# Altium PCB Skayboard.PcbDoc (part 2 of 3)
Units mil, origin at the board's own origin, x right, y up, seen from the top; angles counter-clockwise.
Board outline 13972.57 x 4222.54 mil, 2 copper layers (Top Layer, Bottom Layer); 328 components, 109 nets, 864 pads, 207 vias.
Unrouted connection lines stored in the file: 225.
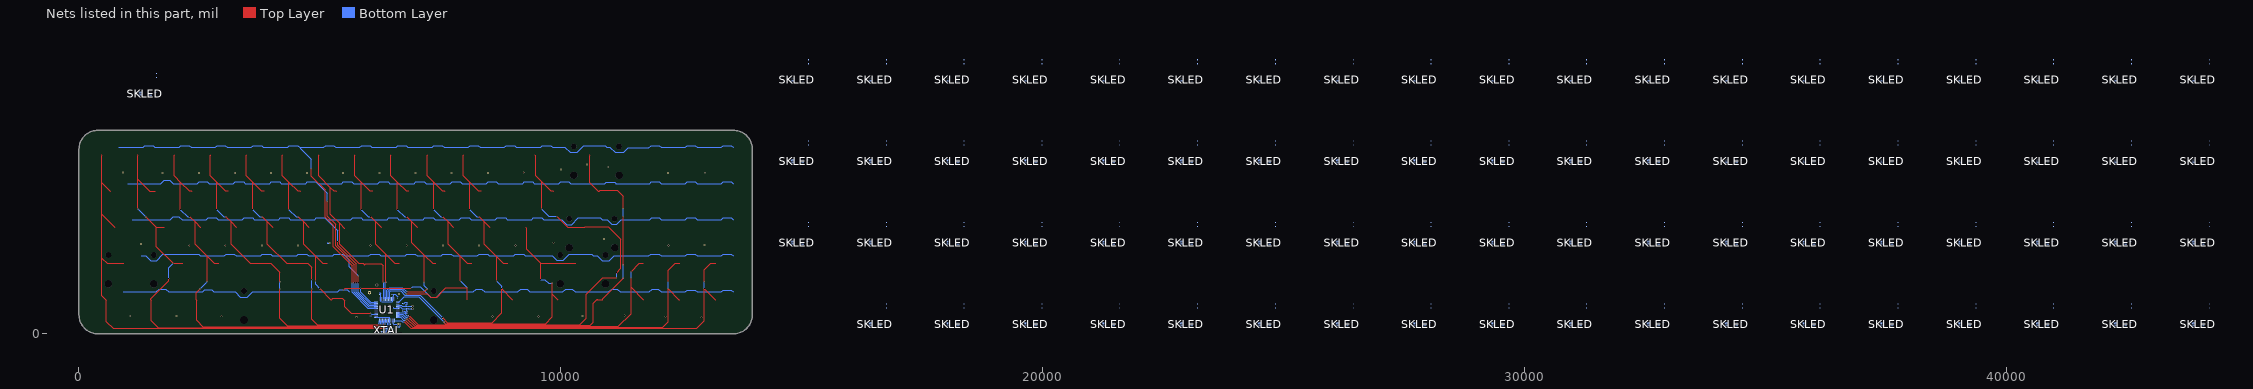
[diagram p2: the nets of this part, all layers, seen from the top]

## Part data
C1 C1 C1 C1 C1 C1 C1 C1 C1 C1 C1 C1 C1 C1 C1 C1 C1 C1 C1 C1 C1 C1 C1 C1 C1 C1 C1 C1 C1 C1 C1 C1 C1 C1 C1 C1 C1 C1 C1 C1 C1 C1 C1 C1 C1 C1 C1 C1 C1 C1 C1 C1 C1 C1 C1 C1 C1 C1 C1 C1 C1 C1 C1 C1 C1 C1 C1 C1 C1 C1 C1 C1 C1 C1 C1 C1 C2 C7 C8 C9 C10 C11 C12 C13: library part CMP-0001-00074-2, Manufacturer=Kemet, Part Number=C0402C104K4RACTU
C3 C4: library part CMP-2008-04368-1, Manufacturer=Murata, Part Number=GRM1555C1H470JA01D
C5 C6: library part CMP-2008-02613-1, Manufacturer="AVX Interconnect / Elco", Part Number=04025A220JAT2A
D1 D1 D1 D1 D1 D1 D1 D1 D1 D1 D1 D1 D1 D1 D1 D1 D1 D1 D1 D1 D1 D1 D1 D1 D1 D1 D1 D1 D1 D1 D1 D1 D1 D1 D1 D1 D1 D1 D1 D1 D1 D1 D1 D1 D1 D1 D1 D1 D1 D1 D1 D1 D1 D1 D1 D1 D1 D1 D1 D1 D1 D1 D1 D1 D1 D1 D1 D1 D1 D1 D1 D1 D1 D1 D1 D1: library part CMP-1667-00004-1, "Fast Switching Diode, 75 V, 0.3 A, -65 to 150 degC, 2-Pin SOD323, RoHS, Tape and Reel", ComponentLink1Description="Manufacturer URL", ComponentLink1URL=http://www.diodes.com/, ComponentLink2Description=Datasheet, ComponentLink2URL=http://www.diodes.com/datasheets/ds30097.pdf, DatasheetVersion="Rev. 25-2, 03/2016", PackageDescription="2-Pin Small Outline Diode, Body 1.7 x 1.3 mm", PackageReference=SOD323-2
MX MX MX MX MX MX MX MX MX MX MX MX MX MX MX MX MX MX MX MX MX MX MX MX MX MX MX MX MX MX MX MX MX MX MX MX MX MX MX MX MX MX MX MX MX MX MX MX MX MX MX MX MX MX MX MX MX MX MX MX MX MX MX MX MX MX MX MX MX MX MX MX MX MX MX MX: library part MX, "Cherry MX Footprint"
R1 R2: library part CMP-2002-08382-1, "22", Manufacturer="Vishay Dale", Part Number=CRCW040222R0FKED
R3: library part CMP-2002-01183-1, Manufacturer=Panasonic, Part Number=ERT-J0ER103J
RST1 USB1: "Header, 2-Pin", LatestRevisionDate=17-Jul-2002, LatestRevisionNote="Re-released for DXP Platform.", Publisher="Altium Limited"
SKLED SKLED SKLED SKLED SKLED SKLED SKLED SKLED SKLED SKLED SKLED SKLED SKLED SKLED SKLED SKLED SKLED SKLED SKLED SKLED SKLED SKLED SKLED SKLED SKLED SKLED SKLED SKLED SKLED SKLED SKLED SKLED SKLED SKLED SKLED SKLED SKLED SKLED SKLED SKLED SKLED SKLED SKLED SKLED SKLED SKLED SKLED SKLED SKLED SKLED SKLED SKLED SKLED SKLED SKLED SKLED SKLED SKLED SKLED SKLED SKLED SKLED SKLED SKLED SKLED SKLED SKLED SKLED SKLED SKLED SKLED SKLED SKLED SKLED SKLED SKLED: library part SK6812, "Individually Adressable SK6812 Mini-E 3528 LED"
U1: library part CMP-0095-00285-2, ComponentLink1Description="Manufacturer URL", ComponentLink1URL=http://www.atmel.com/, ComponentLink2Description="ATmega16U4/32U4 Datasheet", ComponentLink2URL=http://www.atmel.com/dyn/resources/prod_documents/doc7766.pdf, ComponentLink3Description="ATmega16U4 ATmega32U4 Summary", ComponentLink3URL=http://www.atmel.com/dyn/resources/prod_documents/7766S.pdf, DatasheetVersion="revF, Nov-2010", PackageDescription="44-Pin Plastic Thin Quad Flat Pack, 10 x 10 x 1.0 mm Body, 0.8 mm Pitch (TQFP)", PackageReference=44ML, PackageVersion="rev.G, Jul-2007", RevisionNote="DatasheetVersion updated. URLs added."
XTAL: "16Mhz crystal resonator, JLCPCB #C13738"

## Free pads (board coordinates)
  round 70 hole 35: ""(6027.56,854.33) ""(6181.1,1011.81)

## Via types
v1: diameter 40, hole 22, Top Layer to Bottom Layer, 116 vias
v2: diameter 24, hole 12, Top Layer to Bottom Layer, 90 vias
v3: diameter 30, hole 15, Top Layer to Bottom Layer, 1 vias

## Nets (pads, with @x,y where several pads share a name; then routed paths per layer and width w, separated by ;. In a path a pad name is that pad's centre, name@x,y a point inside that pad or via, vN(x,y) a via of type N, cw(c..) or ccw(c..) an arc to the next point about the centre after c; other vN are vias at no path point)
GND: C1.2 C2.2 C3.2 C4.1 C5.1 C6.1 C7.1 C8.1 C9.1 C10.1 C11.1 C12.1 C13.1 pad.@6027.56,854.33 RST1.2 SKLED.3 U1.5 U1.15 U1.23 U1.35 U1.43 XTAL.2 XTAL.4 | length 1593.2
  Bottom Layer w5: 5147.74,1884.89 5148.59,1884.04 v1(5198.98,1884.04) ; U1.15@6452.76,275.59 6452.76,244.03 6437.68,228.95 6437.68,179.74 6449.54,167.88 6465.57,167.88 6465.89,167.57 ; 6740.16,468.5 6756.34,468.5 6784.41,440.44 6793.42,440.44 C4.1@6803.15,430.71
  Bottom Layer w7.5: C13.1@6644.01,137.54 6650.5,144.03 6654,144.03 6665.35,155.39 RST1.2@6665.35,200.79
  Bottom Layer w15: U1.23@6165.35,342.52 6437.01,342.52 6452.76,326.77 U1.15@6452.76,275.59 ; 6232.28,850.39 6232.62,850.05 6254.24,850.05 6263.87,840.42 6263.87,724.5 U1.35@6263.78,724.41 6265.43,722.76 6265.43,688.12 6265.96,687.58 6265.96,675.89 6280.44,661.42 6500,661.42 6514.1,675.52 6514.1,722.76 U1.43@6515.75,724.41 6517.4,726.06 6517.4,778.06 6527.17,787.82 6527.17,818.9 6562.99,818.9 6614.17,767.72 ; v3(6507.87,551.18) 6511.81,551.18 6531.5,531.5 U1.5@6614.17,531.5 ; 6740.16,625.98 6770.53,656.36 C3.2@6802.82,656.36
  Bottom Layer w25: C3.2@6802.82,656.36 C3.2@6803.15,656.69
  other v1: 12917.78,343.05 5754.53,344.55 12168.66,353.98 9532.42,357.71 8583.04,362.71 2959.99,364.55 2020.31,365.68 1063.25,366.55 10450.25,366.56 11324.2,381.18 6643.73,830.02 3795.23,1828.61 4546.35,1830.41 6048.85,1832.48 6801.15,1832.12 7549.15,1832.84 9053.39,1833.56 8300.38,1834.99 2288.77,1836.42 3034.48,1836.42 12229.87,1836.04 12975.91,1841.63 1287.62,1860.26 9844.03,1889.8 10889.43,1965.64 12224.93,3333.33 2488.35,3336.26 1731.83,3337.24 3233.15,3337.23 3981.85,3336.75 6232.37,3336.75 8483.85,3338.21 4730.56,3339.19 5480.73,3338.7 6981.56,3339.68 7730.26,3339.68 12985.84,3341.14 9227.67,3342.61 915.68,3349.44 9997.87,3411.47 10981.97,3458.84 10542.42,3515.99
NetC2_1: C2.1 U1.42
NetC3_1: C3.1 R1.1 U1.3 | length 240.5
  Bottom Layer w5: U1.3@6614.17,594.49 6685.04,594.49 6712.6,566.93 R1.1@6795.28,566.93 C3.1@6795.28,614.17
  Bottom Layer w10: C3.1@6807.09,618.11 C3.1@6807.09,618.9
NetC4_2: C4.2 R2.1 U1.4 | length 255.8
  Bottom Layer w5: U1.4@6614.17,562.99 6670.96,562.99 6710.33,523.62 R2.1@6795.28,523.62 ; C4.2@6795.99,475.66 R2.1@6795.99,522.9
  Bottom Layer w10: R2.1@6795.28,523.62 R2.1@6795.99,522.9 ; C4.2@6795.99,475.66 C4.2@6803.15,468.5
NetC5_2: C5.2 U1.17 XTAL.1 | length 315.4
  Bottom Layer w5: 6364.17,43.31 6405.55,84.68 6405.55,228.45 6404.63,229.32 cw(c6421.26,247.05) 6402.98,231.03 6402.86,231.14 6390.06,243.94 U1.17@6390.06,276.85
  Bottom Layer w20: 6304.72,43.31 6304.93,43.51 6360.44,43.51 6362.2,45.28
NetC6_2: C6.2 U1.16 XTAL.3
NetC13_2: C13.2 R3.2 RST1.1 U1.13 | length 234
  Bottom Layer w7.5: U1.13@6515.75,275.59 6515.75,210.63 R3.2@6527.56,198.82 ; R3.2@6528.54,199.8 6614.37,199.8 RST1.1@6615.35,200.79 6614.76,200.19 6614.76,138.21 C13.2@6614.09,137.54
  Bottom Layer w15: R3.2@6527.56,198.82 R3.2@6528.54,199.8
NetD1_SKEY1_1: D1.1@1609.65,5314.12 D1.1@16750.5,533.89 D1.1@18365.2,533.89 D1.1@19979.89,533.89 D1.1@21594.58,533.89 MX.1@1480.39,5347.13 MX.1@16621.24,566.91 MX.1@18235.94,566.91 MX.1@19850.63,566.91 MX.1@21465.32,566.91 U1.12 | length 8234.3
  Top Layer w5: v2(6744.09,251.97) 6881.89,114.17 12814.96,114.17 12974.41,273.62 v2@12974.41,935.04 ; v2(12974.41,937.01) v2@12974.41,935.04 ; v2(12976.38,1078.74) 12976.38,1326.77 13110.9,1461.29 13211.33,1461.29 ; 13211.33,711.29 13198.16,711.29 v2@12974.41,935.04
  Bottom Layer w5: U1.12@6547.24,275.59 6551.18,271.65 6688.98,271.65 6708.66,251.97 v2(6744.09,251.97) ; v2(12974.41,937.01) 12976.38,938.98 v2(12976.38,1078.74)
NetD1_SKEY1_2: D1.2@1609.65,5397.19 D1.2@18365.2,2306.91 D1.2@21594.58,5686.81 D1.2@23209.28,616.96 D1.2@26438.66,2306.91 D1.2@29668.05,5686.81 D1.2@31282.74,616.96 D1.2@31282.74,3996.86 D1.2@34512.13,2306.91 D1.2@37741.52,5686.81 D1.2@39356.21,616.96 MX.2@1230.39,5247.13 MX.2@17985.94,2156.86 MX.2@21215.32,5536.76 MX.2@22830.02,466.91 MX.2@26059.41,2156.86 MX.2@29288.79,5536.76 MX.2@30903.49,466.91 MX.2@30903.49,3846.81 MX.2@34132.87,2156.86 MX.2@37362.26,5536.76 MX.2@38976.95,466.91 U1.33 | length 13938.8
  Top Layer w5: v2(5488.07,909.45) 5523.5,944.88 v2(5846.46,944.88) v2(6893.7,944.88)
  Bottom Layer w5: 921.11,868.51 1600.79,868.51 1661.42,929.13 1797,929.13 1857.63,868.51 1858.61,868.51 2569.3,868.51 2610.24,909.45 2753.21,909.45 2794.15,868.51 2795.13,868.51 ; 2796.11,868.51 3237.79,868.51 3350.39,755.91 3492.13,755.91 3606.3,870.08 5370.08,870.08 5409.45,909.45 v2(5488.07,909.45) 5566.68,909.45 5607.61,868.52 5608.6,868.52 ; v2(5846.46,944.88) 5846.46,863.12 6052.09,657.48 U1.33@6165.35,657.48 ; v2(6893.7,944.88) 6921.26,972.44 7082.68,972.44 7295.28,759.84 7421.26,759.84 7531.5,870.08 8181.1,870.08 8240.16,929.13 8359.52,929.13 8420.13,868.52 8421.12,868.52 9100.8,868.52 9161.43,929.15 9297.01,929.15 9357.64,868.52 10041.75,868.52 10102.38,929.15 10233.53,929.15 10294.16,868.52 10295.14,868.52 ; 10296.12,868.52 10990.56,868.52 11051.19,929.15 11172.01,929.15 11232.64,868.52 11829.15,868.52 11889.76,929.13 12016.8,929.13 12077.4,868.54 ; 12080.29,868.54 12579.23,868.54 12616.18,905.49 12789.46,905.49 12826.44,868.51 13328.27,868.51 13365.23,905.47 13538.51,905.47 13575.49,868.49
NetD1_SKEY2_2: D1.2@15135.81,5686.81 D1.2@16750.5,616.96 D1.2@18365.2,3996.86 D1.2@19979.89,2306.91 D1.2@23209.28,5686.81 D1.2@24823.97,616.96 D1.2@24823.97,3996.86 D1.2@28053.36,2306.91 D1.2@31282.74,5686.81 D1.2@32897.44,616.96 D1.2@32897.44,3996.86 D1.2@36126.83,2306.91 D1.2@39356.21,3996.86 D1.2@39356.21,5686.81 D1.2@42585.6,2306.91 MX.2@14756.55,5536.76 MX.2@16371.24,466.91 MX.2@17985.94,3846.81 MX.2@19600.63,2156.86 MX.2@22830.02,5536.76 MX.2@24444.71,466.91 MX.2@24444.71,3846.81 MX.2@27674.1,2156.86 MX.2@30903.49,5536.76 MX.2@32518.18,466.91 MX.2@32518.18,3846.81 MX.2@35747.57,2156.86 MX.2@38976.95,3846.81 MX.2@38976.95,5536.76 MX.2@42206.34,2156.86 U1.32 | length 14269.3
  Top Layer w5: v2@5794,1061.72 5799.21,1066.93 v2(5799.21,1200.79)
  Bottom Layer w5: 1296.11,1618.5 1389.37,1618.5 1488.19,1519.68 1610.24,1519.68 1740.16,1649.61 2482.78,1649.61 2513.87,1618.51 2514.86,1618.51 3016.69,1618.51 3053.64,1655.46 3226.92,1655.46 3263.9,1618.48 3766.72,1618.48 3803.67,1655.44 3976.95,1655.44 4013.93,1618.46 4515.76,1618.46 4552.72,1655.41 4726,1655.41 4762.98,1618.43 5264.81,1618.43 5301.76,1655.39 5475.04,1655.39 5512.02,1618.41 ; 5514.86,1618.52 5519.28,1618.52 ; v2(5799.21,1059.06) 5799.21,867.05 6040.28,625.98 U1.32@6165.35,625.98 ; v2@5801.51,1198.49 5798.78,1198.49 5795.58,1201.69 5795.58,1204.42 5610.24,1389.76 5610.24,1527.56 5519.31,1618.48 6016.72,1618.48 6053.67,1655.44 6226.95,1655.44 6263.93,1618.46 ; 6264.82,1618.48 6766.65,1618.48 6803.61,1655.44 6976.88,1655.44 7013.87,1618.46 7515.69,1618.46 7552.65,1655.41 7725.93,1655.41 7762.91,1618.43 ; 7764.9,1618.48 8266.73,1618.48 8303.68,1655.44 8476.96,1655.44 8513.94,1618.46 ; 8514.9,1618.48 9016.73,1618.48 9053.68,1655.44 9226.96,1655.44 9263.94,1618.46 ; 9264.86,1618.52 9818.49,1618.52 9913.39,1523.62 10047.24,1523.62 10169.29,1645.67 10642.98,1645.67 10670.13,1618.52 10671.12,1618.52 10751.56,1618.52 10854.33,1515.75 11003.94,1515.75 11106.3,1618.11 11822.83,1618.11 11858.27,1653.54 12041.41,1653.54 12076.41,1618.54 12077.4,1618.54 12579.23,1618.54 12616.18,1655.49 12789.46,1655.49 12826.44,1618.51 13328.27,1618.51 13365.23,1655.47 13538.51,1655.47 13575.49,1618.49
NetD1_SKEY3_2: D1.2@16750.5,5686.81 D1.2@18365.2,616.96 D1.2@19979.89,3996.86 D1.2@21594.58,2306.91 D1.2@24823.97,5686.81 D1.2@26438.66,616.96 D1.2@26438.66,3996.86 D1.2@29668.05,2306.91 D1.2@32897.44,5686.81 D1.2@34512.13,616.96 D1.2@34512.13,3996.86 D1.2@37741.52,2306.91 D1.2@40970.91,3996.86 D1.2@40970.91,5686.81 D1.2@44200.29,616.96 D1.2@44200.29,2306.91 MX.2@16371.24,5536.76 MX.2@17985.94,466.91 MX.2@19600.63,3846.81 MX.2@21215.32,2156.86 MX.2@24444.71,5536.76 MX.2@26059.41,466.91 MX.2@26059.41,3846.81 MX.2@29288.79,2156.86 MX.2@32518.18,5536.76 MX.2@34132.87,466.91 MX.2@34132.87,3846.81 MX.2@37362.26,2156.86 MX.2@40591.65,3846.81 MX.2@40591.65,5536.76 MX.2@43821.03,466.91 MX.2@43821.03,2156.86 U1.31 | length 15388.5
  Top Layer w5: v2(5370.08,1913.39) 5370.08,1842.52 5755.91,1456.69 v2(5755.91,1059.06)
  Bottom Layer w5: 1108.61,2368.5 1896.06,2368.5 1960.63,2433.07 2074.31,2433.07 2138.87,2368.5 2139.86,2368.5 2641.69,2368.5 2678.64,2405.46 2851.92,2405.46 2888.9,2368.48 3391.72,2368.48 3428.67,2405.43 3601.95,2405.43 3638.93,2368.45 4140.76,2368.45 4177.72,2405.41 4351,2405.41 4387.98,2368.43 4889.81,2368.43 4926.76,2405.38 5100.04,2405.38 5137.02,2368.4 ; 5139.86,2368.51 5140.84,2368.51 ; v2(5370.08,1913.39) 5370.08,2138.29 5156.06,2352.31 5156.06,2353.3 5140.88,2368.48 ; v2(5755.91,1059.06) 5755.91,863.12 6024.53,594.49 U1.31@6165.35,594.49 ; 5888.93,2368.45 5851.95,2405.43 5678.67,2405.43 5641.72,2368.48 5140.88,2368.48 ; 5889.82,2368.48 6391.65,2368.48 6428.61,2405.43 6601.88,2405.43 6638.87,2368.45 7140.69,2368.45 7177.65,2405.41 7350.93,2405.41 7387.91,2368.43 ; 7389.9,2368.48 7891.73,2368.48 7928.68,2405.43 8101.96,2405.43 8138.94,2368.45 ; 8139.9,2368.48 8641.73,2368.48 8678.68,2405.43 8851.96,2405.43 8888.94,2368.45 ; 8889.9,2368.48 9391.73,2368.48 9428.68,2405.43 9601.96,2405.43 9638.94,2368.45 ; 9639.86,2368.51 10017.32,2368.51 10118.11,2267.72 10224.41,2267.72 10362.2,2405.51 10820.61,2405.51 10857.61,2368.51 10858.6,2368.51 10958.26,2368.51 11055.12,2271.65 11157.48,2271.65 11251.97,2366.14 11842.52,2366.14 11885.83,2409.45 12035.5,2409.45 12076.41,2368.53 12077.4,2368.53 12579.23,2368.53 12616.18,2405.49 12789.46,2405.49 12826.44,2368.51 13328.27,2368.51 13365.23,2405.46 13538.51,2405.46 13575.49,2368.48
NetD1_SKEY4_2: D1.2@15135.81,2306.91 D1.2@15135.81,3996.86 D1.2@18365.2,5686.81 D1.2@19979.89,616.96 D1.2@21594.58,3996.86 D1.2@23209.28,2306.91 D1.2@26438.66,5686.81 D1.2@28053.36,616.96 D1.2@28053.36,3996.86 D1.2@31282.74,2306.91 D1.2@34512.13,5686.81 D1.2@36126.83,616.96 D1.2@36126.83,3996.86 D1.2@39356.21,2306.91 D1.2@40970.91,616.96 D1.2@42585.6,3996.86 D1.2@42585.6,5686.81 MX.2@14756.55,2156.86 MX.2@14756.55,3846.81 MX.2@17985.94,5536.76 MX.2@19600.63,466.91 MX.2@21215.32,3846.81 MX.2@22830.02,2156.86 MX.2@26059.41,5536.76 MX.2@27674.1,466.91 MX.2@27674.1,3846.81 MX.2@30903.49,2156.86 MX.2@34132.87,5536.76 MX.2@35747.57,466.91 MX.2@35747.57,3846.81 MX.2@38976.95,2156.86 MX.2@40591.65,466.91 MX.2@42206.34,3846.81 MX.2@42206.34,5536.76 U1.30 | length 16219.8
  Top Layer w5: v2(5153.54,2751.97) 5153.54,2440.94 5322.83,2271.65 5322.83,1826.77 5712.6,1437.01 v2(5712.6,1059.06)
  Bottom Layer w5: 1014.86,3118.5 1701.18,3118.5 1767.72,3185.04 1884.89,3185.04 1951.4,3118.53 1952.39,3118.53 2454.22,3118.53 2491.17,3155.49 2664.45,3155.49 2701.43,3118.51 ; 2702.39,3118.53 3204.22,3118.53 3241.17,3155.49 3414.45,3155.49 3451.43,3118.51 3953.26,3118.51 3990.22,3155.46 4163.49,3155.46 4200.48,3118.48 4702.3,3118.48 4739.26,3155.44 4912.54,3155.44 4949.52,3118.46 4952.4,3118.46 ; 4952.4,3118.53 4953.38,3118.53 4953.46,3118.46 ; v2(5153.54,2751.97) 5153.54,2917.39 4968.6,3102.33 4968.6,3103.31 4953.46,3118.46 ; 5698.56,3118.43 5661.58,3155.41 5488.3,3155.41 5451.35,3118.46 4953.46,3118.46 ; 5702.4,3118.53 6204.23,3118.53 6241.18,3155.49 6414.46,3155.49 6451.44,3118.51 ; v2(5712.6,1059.06) 5712.6,858.27 6007.87,562.99 6041.78,562.99 U1.30@6165.35,562.99 ; 6452.4,3118.53 6954.23,3118.53 6991.18,3155.49 7164.46,3155.49 7201.44,3118.51 7703.27,3118.51 7740.23,3155.46 7913.51,3155.46 7950.49,3118.48 8452.32,3118.48 8489.27,3155.44 8662.55,3155.44 8699.53,3118.46 ; 8702.4,3118.53 9204.23,3118.53 9241.18,3155.49 9414.46,3155.49 9451.44,3118.51 ; 9452.4,3118.53 9954.23,3118.53 9991.18,3155.49 10164.46,3155.49 10201.44,3118.51 ; 10202.4,3118.53 10912.52,3118.53 10939.65,3145.67 11112.93,3145.67 11123.66,3134.95 11123.66,3133.73 11148.7,3108.69 11149.91,3108.69 ; 11139.86,3118.51 11838.98,3118.51 11875.94,3155.47 12039.6,3155.47 12061.2,3133.87 12061.2,3133.75 12076.41,3118.53 12077.4,3118.53 ; 12078.69,3118.53 12579.23,3118.53 12616.18,3155.49 12789.46,3155.49 12826.44,3118.51 13328.27,3118.51 13365.23,3155.46 13538.51,3155.46 13575.49,3118.48
NetD1_SKEY5_2: D1.2@16750.5,2306.91 D1.2@16750.5,3996.86 D1.2@19979.89,5686.81 D1.2@21594.58,616.96 D1.2@23209.28,3996.86 D1.2@24823.97,2306.91 D1.2@28053.36,5686.81 D1.2@29668.05,616.96 D1.2@29668.05,3996.86 D1.2@32897.44,2306.91 D1.2@36126.83,5686.81 D1.2@37741.52,616.96 D1.2@37741.52,3996.86 D1.2@40970.91,2306.91 D1.2@42585.6,616.96 D1.2@44200.29,3996.86 D1.2@44200.29,5686.81 MX.2@16371.24,2156.86 MX.2@16371.24,3846.81 MX.2@19600.63,5536.76 MX.2@21215.32,466.91 MX.2@22830.02,3846.81 MX.2@24444.71,2156.86 MX.2@27674.1,5536.76 MX.2@29288.79,466.91 MX.2@29288.79,3846.81 MX.2@32518.18,2156.86 MX.2@35747.57,5536.76 MX.2@37362.26,466.91 MX.2@37362.26,3846.81 MX.2@40591.65,2156.86 MX.2@42206.34,466.91 MX.2@43821.03,3846.81 MX.2@43821.03,5536.76 U1.29 | length 17490.6
  Top Layer w5: v2(4822.83,3421.26) 4822.83,3271.65 5106.3,2988.19 5106.3,2421.26 5271.65,2255.91 5271.65,1807.09 5665.35,1413.39 v2(5665.35,1059.06)
  Bottom Layer w5: 827.36,3868.56 1329.19,3868.56 1366.14,3905.51 1539.42,3905.51 1576.4,3868.53 1577.39,3868.53 2079.22,3868.53 2116.17,3905.49 2289.45,3905.49 2326.43,3868.51 2828.26,3868.51 2865.22,3905.46 3038.5,3905.46 3075.48,3868.48 3577.3,3868.48 3614.26,3905.44 3787.54,3905.44 3824.52,3868.46 ; 3827.39,3868.53 4329.22,3868.53 4366.17,3905.49 4539.45,3905.49 4576.43,3868.51 ; 4577.32,3868.53 4578.3,3868.53 ; v2(4822.83,3421.26) 4822.83,3623.02 4593.52,3852.33 4593.52,3853.31 4578.3,3868.53 ; v2(5665.35,1059.06) 5665.35,858.27 5992.13,531.5 U1.29@6165.35,531.5 ; 6075.41,3868.48 6038.43,3905.46 5865.15,3905.46 5828.19,3868.51 5326.36,3868.51 5289.38,3905.49 5116.1,3905.49 5079.15,3868.53 4578.3,3868.53 ; 6077.4,3868.53 6579.23,3868.53 6616.18,3905.49 6789.46,3905.49 6826.44,3868.51 ; 6827.4,3868.53 7329.23,3868.53 7366.18,3905.49 7539.46,3905.49 7576.44,3868.51 ; 7577.4,3868.53 8079.23,3868.53 8116.18,3905.49 8289.46,3905.49 8326.44,3868.51 8828.27,3868.51 8865.23,3905.46 9038.51,3905.46 9075.49,3868.48 ; 9077.4,3868.53 9579.23,3868.53 9616.18,3905.49 9789.46,3905.49 9826.44,3868.51 ; 9827.4,3868.53 10084.22,3868.53 10188.98,3763.78 10342.52,3763.78 10476.38,3897.64 10922.31,3897.64 10951.41,3868.53 10952.4,3868.53 11017.3,3868.53 11122.05,3763.78 11299.21,3763.78 11397.64,3862.2 11826.77,3862.2 11870.08,3905.51 12039.43,3905.51 12076.41,3868.53 12077.4,3868.53 12579.23,3868.53 12616.18,3905.49 12789.46,3905.49 12826.44,3868.51 13328.27,3868.51 13365.23,3905.46 13538.51,3905.46 13575.49,3868.48
NetD1_SKEY6_1: D1.1@23209.28,533.89 D1.1@24823.97,533.89 D1.1@26438.66,533.89 D1.1@28053.36,533.89 D1.1@29668.05,533.89 MX.1@23080.02,566.91 MX.1@24694.71,566.91 MX.1@26309.41,566.91 MX.1@27924.1,566.91 MX.1@29538.79,566.91 U1.11 | length 7438
  Top Layer w5: v2(6773.04,282.73) 6921.92,133.86 12110.24,133.86 12224.41,248.03 v2@12224.41,935.04 ; v2(12224.41,937.01) v2@12224.41,935.04 ; v2(12224.41,1082.68) 12224.41,1314.96 12370.74,1461.29 12461.33,1461.29 ; 12461.33,711.29 12448.16,711.29 v2@12224.41,935.04
  Bottom Layer w5: U1.11@6614.17,342.52 6673.23,342.52 6733.01,282.73 v2(6773.04,282.73) ; v2(12224.41,937.01) v2(12224.41,1082.68)
NetD1_SKEY11_1: D1.1@31282.74,533.89 D1.1@32897.44,533.89 D1.1@34512.13,533.89 D1.1@36126.83,533.89 D1.1@37741.52,533.89 MX.1@31153.49,566.91 MX.1@32768.18,566.91 MX.1@34382.87,566.91 MX.1@35997.57,566.91 MX.1@37612.26,566.91 U1.10 | length 6602.4
  Top Layer w5: v2(6802.76,312.25) 6804.15,312.25 6962.86,153.54 11193.21,153.54 11456.69,417.03 11456.69,965.92 ; v2(11456.69,1153.54) 11456.69,965.92 ; v2(11456.69,1291.34) 11626.64,1461.29 11711.33,1461.29 ; 11711.33,711.29 11456.69,965.92
  Bottom Layer w5: U1.10@6614.17,374.02 6696.85,374.02 6758.61,312.25 v2(6802.76,312.25) ; v2(11456.69,1153.54) v2(11456.69,1291.34)
NetD1_SKEY16_1: D1.1@39356.21,533.89 D1.1@40970.91,533.89 D1.1@42585.6,533.89 MX.1@39226.95,566.91 MX.1@40841.65,566.91 MX.1@42456.34,566.91 U1.9 | length 8528.1
  Top Layer w5: v2(6831.48,343.77) 7002.01,173.23 10606.3,173.23 10669.29,236.22 10669.29,629.92 10751.97,712.6 10753.57,712.6 10754.9,711.27 10867.53,711.27 10867.53,729.73 11291.34,1153.54 v2(11291.34,1157.48) ; 10586.33,3711.29 10598.43,3699.19 10598.43,3136.63 10773.79,2961.27 10796.79,2961.27 10815.84,2980.32 11165.35,2980.32 11291.34,2854.33 v2(11291.34,2602.36) ; v2(11291.34,1429.13) v2(11291.34,2429.13)
  Bottom Layer w5: U1.9@6614.17,405.51 6720.47,405.51 6782.22,343.77 v2(6831.48,343.77) ; v2(11291.34,1157.48) v2(11291.34,1429.13) ; v2(11291.34,2429.13) v2(11291.34,2602.36)
NetD1_SKEY19_1: D1.1@15135.81,2223.84 D1.1@16750.5,2223.84 D1.1@44200.29,533.89 MX.1@15006.55,2256.86 MX.1@16621.24,2256.86 MX.1@44071.03,566.91 U1.8 | length 9579.6
  Top Layer w5: v2(6854.21,377.87) 7039.17,192.91 10393.7,192.91 10527.56,326.77 10527.56,818.9 10870.08,1161.42 v2(11153.54,1161.42) ; 9461.33,3711.29 9472.45,3700.16 9472.45,3279.53 9598.43,3153.56 ; v2(9598.43,2586.61) 9598.43,3153.56 ; 9836.33,2961.29 9832.39,2965.23 9786.75,2965.23 9598.43,3153.56 ; v2(9917.32,2437.01) 10143.07,2211.27 10492.53,2211.27 10505.67,2224.41 10980.31,2224.41 11240.16,1964.57 11240.16,1358.27 11153.54,1271.65 v2(11152.56,1271.65)
  Bottom Layer w5: U1.8@6614.17,437.01 6744.09,437.01 6803.23,377.87 v2(6854.21,377.87) ; v2(9598.43,2586.61) 9748.03,2437.01 v2(9917.32,2437.01) ; v2(11152.56,1271.65) 11153.54,1270.67 v2(11153.54,1161.42)
NetD1_SKEY22_1: D1.1@18365.2,2223.84 D1.1@19979.89,2223.84 D1.1@21594.58,2223.84 D1.1@23209.28,2223.84 D1.1@24823.97,2223.84 MX.1@18235.94,2256.86 MX.1@19850.63,2256.86 MX.1@21465.32,2256.86 MX.1@23080.02,2256.86 MX.1@24694.71,2256.86 U1.1 | length 6609.6
  Top Layer w5: v2(7566.93,244.09) 7570.87,244.09 7602.36,212.6 9681.1,212.6 9818.9,350.39 9818.9,822.42 ; 9273.79,2211.27 9287.4,2197.65 9287.4,1751.97 9578.1,1461.27 ; v2(9578.74,1125.98) 9578.74,1460.63 9578.1,1461.27 ; v2(9818.9,1051.18) 9818.9,822.42 ; 9930.05,711.27 9818.9,822.42 ; 10305.05,1461.27 9578.1,1461.27
  Bottom Layer w5: U1.1@6614.17,657.48 6637.68,657.48 6646.28,666.08 6646.28,669.9 6744.09,767.72 7047.24,767.72 7566.93,248.03 v2(7566.93,244.09) ; v2(9578.74,1125.98) 9669.29,1125.98 9744.09,1051.18 v2(9818.9,1051.18)
NetD1_SKEY27_1: D1.1@26438.66,2223.84 D1.1@28053.36,2223.84 D1.1@29668.05,2223.84 D1.1@31282.74,2223.84 D1.1@32897.44,2223.84 MX.1@26309.41,2256.86 MX.1@27924.1,2256.86 MX.1@29538.79,2256.86 MX.1@31153.49,2256.86 MX.1@32768.18,2256.86 U1.41 | length 7528.8
  Top Layer w5: v2(7543.31,334.65) 7645.67,232.28 8570.87,232.28 8771.65,433.07 v2@8771.65,932.14 ; 7961.33,3711.29 7972.45,3700.16 7972.45,3279.53 8106.31,3145.67 ; v2(8106.31,2578.74) 8106.31,3145.67 ; v2@8300.43,2429.13 8409.37,2320.2 ; 8336.33,2961.29 8332.39,2965.23 8286.75,2965.23 8106.31,3145.67 ; 8518.31,2211.26 8409.37,2320.2 ; v2(8665.35,1092.51) 8665.35,1602.04 ; v2(8771.65,937.01) v2@8771.65,932.14 ; 8898.8,1461.26 8806.47,1461.26 8409.37,1858.36 8409.37,2320.2 ; 8992.53,711.27 v2@8771.65,932.14
  Bottom Layer w5: U1.41@6452.76,724.41 6452.76,872.49 6470.03,889.76 6673.23,889.76 6763.78,799.21 7078.74,799.21 v2(7543.31,334.65) ; v2(8106.31,2578.74) 8255.92,2429.13 v2(8295.29,2429.13) ; v2(8665.35,1092.51) 8771.65,986.21 v2(8771.65,937.01)
NetD1_SKEY32_1: D1.1@34512.13,2223.84 D1.1@36126.83,2223.84 D1.1@37741.52,2223.84 D1.1@39356.21,2223.84 D1.1@40970.91,2223.84 MX.1@34382.87,2256.86 MX.1@35997.57,2256.86 MX.1@37612.26,2256.86 MX.1@39226.95,2256.86 MX.1@40841.65,2256.86 U1.40 | length 6095.6
  Top Layer w5: v2(6787.4,830.71) 7224.41,830.71 7295.28,759.84 7421.26,759.84 7614.17,952.76 8057.05,952.76 v2(8059.06,952.76) 8057.05,950.75 8057.05,713.27 8055.05,711.27 ; 7211.33,3711.29 7222.45,3700.16 7222.45,3279.53 7356.31,3145.67 ; v2(7356.31,2578.74) 7356.31,3145.67 ; v2@7550.43,2429.13 7659.37,2320.2 ; 7586.33,2961.29 7582.39,2965.23 7536.75,2965.23 7356.31,3145.67 ; 7768.31,2211.26 7659.37,2320.2 ; v2(7913.39,1098.43) 7913.39,1604.34 7911.43,1606.3 ; 8148.8,1461.26 8056.47,1461.26 7911.43,1606.3 ; 7659.37,2320.2 7659.37,1858.36 7911.43,1606.3
  Bottom Layer w5: U1.40@6421.26,724.41 6421.26,885.83 6460.63,925.2 6692.91,925.2 v2(6787.4,830.71) ; v2(7356.31,2578.74) 7505.92,2429.13 v2(7545.29,2429.13) ; v2(7913.39,1098.43) v2(8059.06,952.76)
NetD1_SKEY37_1: D1.1@15135.81,3913.79 D1.1@16750.5,3913.79 D1.1@42585.6,2223.84 D1.1@44200.29,2223.84 MX.1@15006.55,3946.81 MX.1@16621.24,3946.81 MX.1@42456.34,2256.86 MX.1@44071.03,2256.86 U1.39 | length 4986
  Top Layer w5: 6461.33,3711.29 6472.45,3700.16 6472.45,3279.53 6606.31,3145.67 ; v2(6606.31,2578.74) 6606.31,3145.67 ; v2@6800.43,2429.13 6909.37,2320.2 ; v2(6812.13,871.59) 7162.93,871.59 v2(7224.41,933.07) ; 6836.33,2961.29 6832.39,2965.23 6786.75,2965.23 6606.31,3145.67 ; 7018.31,2211.26 6909.37,2320.2 ; v2(7161.42,1070.87) 7161.42,1635.12 ; 7398.8,1461.26 7335.28,1461.26 7161.42,1635.12 ; 6909.37,2320.2 6909.37,1887.17 7161.42,1635.12
  Bottom Layer w5: U1.39@6389.76,724.41 6389.76,905.51 6444.88,960.63 6708.66,960.63 6797.7,871.59 v2(6812.13,871.59) ; v2(6606.31,2578.74) 6755.92,2429.13 v2(6795.29,2429.13) ; v2(7161.42,1070.87) 7161.42,996.06 v2(7224.41,933.07)
NetD1_SKEY41_1: D1.1@18365.2,3913.79 D1.1@19979.89,3913.79 D1.1@21594.58,3913.79 D1.1@23209.28,3913.79 MX.1@18235.94,3946.81 MX.1@19850.63,3946.81 MX.1@21465.32,3946.81 MX.1@23080.02,3946.81 U1.38 | length 4101.9
  Top Layer w5: 5711.33,3711.29 5722.45,3700.16 5722.45,3279.53 5856.31,3145.67 ; v2(5856.31,2578.74) 5856.31,3145.67 ; v2@6050.43,2429.13 6159.37,2320.2 ; 6086.33,2961.29 6082.39,2965.23 6036.75,2965.23 5856.31,3145.67 ; 6268.31,2211.26 6159.37,2320.2 ; v2(6370.08,1070.87) 6370.08,1647.65 ; 6648.8,1461.26 6556.47,1461.26 6370.08,1647.65 ; 6159.37,2320.2 6159.37,1858.36 6370.08,1647.65
  Bottom Layer w5: v2(5856.31,2578.74) 6005.92,2429.13 v2(6045.29,2429.13) ; U1.38@6358.27,724.41 6358.27,1055.1 6370.08,1066.91 v2(6370.08,1070.87)
NetD1_SKEY45_1: D1.1@24823.97,3913.79 D1.1@26438.66,3913.79 D1.1@28053.36,3913.79 D1.1@29668.05,3913.79 MX.1@24694.71,3946.81 MX.1@26309.41,3946.81 MX.1@27924.1,3946.81 MX.1@29538.79,3946.81 U1.37 | length 4132.6
  Top Layer w5: 4961.29,3711.32 4972.41,3700.2 4972.41,3279.57 5216.54,3035.44 ; 5336.29,2961.32 5332.35,2965.26 5286.72,2965.26 5216.54,3035.44 ; 5515.75,2192.91 5507.87,2192.91 5409.33,2291.46 ; 5898.76,1461.3 5806.43,1461.3 5409.33,1858.4 5409.33,2291.46 ; 5898.79,1461.27 5923.05,1437.01 5930.05,1437.01 5945.32,1452.27 6276.08,1452.27 6314.96,1413.39 v2(6314.96,1070.87) ; 5216.54,3035.44 5216.54,2484.25 5409.33,2291.46
  Bottom Layer w5: v2(6314.96,1070.87) 6314.96,1066.91 6326.77,1055.1 U1.37@6326.77,724.41
NetD1_SKEY49_1: D1.1@31282.74,3913.79 D1.1@32897.44,3913.79 D1.1@34512.13,3913.79 D1.1@36126.83,3913.79 D1.1@37741.52,3913.79 MX.1@31153.49,3946.81 MX.1@32768.18,3946.81 MX.1@34382.87,3946.81 MX.1@35997.57,3946.81 MX.1@37612.26,3946.81 U1.25 | length 5363.7
  Top Layer w5: 4211.25,3711.29 4222.37,3700.16 4222.37,3279.53 4356.23,3145.67 ; v2(4356.23,2578.74) 4356.23,3145.67 ; v2@4550.35,2429.13 4659.29,2320.2 ; 4586.25,2961.29 4582.31,2965.23 4536.68,2965.23 4356.23,3145.67 ; 4768.23,2211.26 4659.29,2320.2 ; v2(4909.45,1094.49) 4909.45,1604.4 4911.35,1606.3 ; v2(4996.06,937.01) 5001.2,937.01 5226.94,711.27 5242.53,711.27 5267.48,736.22 5464.57,736.22 5515.75,685.04 5515.75,559.06 5645.67,429.13 v2(6047.24,429.13) ; 5148.72,1461.26 5056.39,1461.26 4911.35,1606.3 ; 4659.29,2320.2 4659.29,1858.36 4911.35,1606.3
  Bottom Layer w5: v2(4356.23,2578.74) 4505.84,2429.13 v2(4545.21,2429.13) ; v2(4909.45,1094.49) 4909.45,1023.62 v2(4996.06,937.01) ; v2(6047.24,429.13) 6070.87,405.51 U1.25@6165.35,405.51
NetD1_SKEY54_1: D1.1@39356.21,3913.79 D1.1@40970.91,3913.79 D1.1@42585.6,3913.79 D1.1@44200.29,3913.79 MX.1@39226.95,3946.81 MX.1@40841.65,3946.81 MX.1@42456.34,3946.81 MX.1@44071.03,3946.81 U1.22 | length 6240.7
  Top Layer w5: 3461.31,3711.29 3472.44,3700.16 3472.44,3279.53 3606.3,3145.67 ; v2(3606.3,2578.74) 3606.3,3145.67 ; v2@3800.42,2429.13 3909.36,2320.2 ; 3836.31,2961.29 3832.37,2965.23 3786.74,2965.23 3606.3,3145.67 ; 4018.29,2211.26 3909.36,2320.2 ; 4398.79,1461.26 4306.46,1461.26 3909.36,1858.36 3909.36,2320.2 ; 4398.79,1461.27 4747.39,1461.27 4830.71,1377.95 v2(4830.71,1122.05) ; v2(4830.71,929.13) 4830.71,303.15 4944.88,188.98 6212.6,188.98 6219.82,196.2 v2(6222.8,196.2)
  Bottom Layer w5: v2(3606.3,2578.74) 3755.91,2429.13 v2(3795.28,2429.13) ; v2(4830.71,929.13) v2(4830.71,1122.05) ; v2(6222.8,196.2) 6222.8,204.32 6232.28,213.8 U1.22@6232.28,275.59
NetD1_SKEY58_1: D1.1@15135.81,5603.74 D1.1@16750.5,5603.74 D1.1@18365.2,5603.74 D1.1@19979.89,5603.74 MX.1@15006.55,5636.76 MX.1@16621.24,5636.76 MX.1@18235.94,5636.76 MX.1@19850.63,5636.76 U1.21 | length 8474.7
  Top Layer w5: 2711.26,3709.76 2722.39,3698.64 2722.39,3278.01 2856.25,3144.15 ; 2711.31,3711.29 2722.44,3700.16 2722.44,3279.53 2856.3,3145.67 ; v2(2856.25,2577.22) 2856.25,3144.15 ; v2@2856.3,2578.74 2856.3,3144.1 ; v2@3050.42,2429.13 3159.36,2320.2 ; 3086.26,2959.76 3082.32,2963.7 3036.69,2963.7 2856.3,3144.1 ; 3086.31,2961.29 3082.37,2965.23 3036.74,2965.23 2856.3,3145.67 ; 3268.29,2211.26 3159.36,2320.2 ; 3556.41,1459.74 3648.74,1459.74 ; 3556.46,1461.26 3159.36,1858.36 3159.36,2320.2 ; 3648.79,1461.27 3983.62,1461.27 4145.67,1299.21 4169.29,1275.59 v2(4169.29,1078.74) ; v2(4169.29,929.13) 4169.29,326.02 4326.02,169.29 6244.73,169.29 v2(6263.53,188.09) ; 2856.25,3144.15 2856.3,3144.1 ; 2856.3,3144.1 2856.3,3145.67
  Bottom Layer w5: v2(2856.25,2577.22) 3005.86,2427.61 v2(3045.23,2427.61) ; v2(4169.29,929.13) v2(4169.29,1078.74) ; v2(6263.53,188.09) 6263.53,274.47 6264.22,275.15 U1.21@6263.78,275.59
NetD1_SKEY62_1: D1.1@21594.58,5603.74 D1.1@23209.28,5603.74 D1.1@24823.97,5603.74 D1.1@26438.66,5603.74 D1.1@28053.36,5603.74 MX.1@21465.32,5636.76 MX.1@23080.02,5636.76 MX.1@24694.71,5636.76 MX.1@26309.41,5636.76 MX.1@27924.1,5636.76 U1.20 | length 8641.3
  Top Layer w5: 1961.31,3711.29 1972.44,3700.16 1972.44,3279.53 2106.3,3145.67 ; v2(2106.3,2578.74) 2106.3,3145.67 ; v2(2295.28,2429.13) 2300.42,2429.13 2409.36,2320.2 ; 2336.31,2961.29 2332.37,2965.23 2286.74,2965.23 2106.3,3145.67 ; v2(2515.75,933.07) 2430.04,847.36 2430.04,711.26 2440.94,700.36 2440.94,279.53 2570.87,149.61 6280.31,149.61 6290.21,159.51 v2(6294.7,159.51) ; 2523.79,2211.26 2518.29,2211.26 2409.36,2320.2 ; v2(2661.42,1078.74) 2661.42,1606.3 ; 2898.79,1461.26 2806.46,1461.26 2661.42,1606.3 ; 2409.36,2320.2 2409.36,1858.36 2661.42,1606.3
  Bottom Layer w5: v2(2106.3,2578.74) 2255.91,2429.13 v2(2295.28,2429.13) ; v2(2515.75,933.07) v2(2661.42,1078.74) ; v2(6294.7,159.51) 6294.7,270.71 6295.39,271.4 6294.72,272.07 6294.83,272.18 6293.35,273.66 U1.20@6295.28,275.59
NetD1_SKEY67_1: D1.1@29668.05,5603.74 D1.1@31282.74,5603.74 D1.1@32897.44,5603.74 D1.1@34512.13,5603.74 D1.1@36126.83,5603.74 MX.1@29538.79,5636.76 MX.1@31153.49,5636.76 MX.1@32768.18,5636.76 MX.1@34382.87,5636.76 MX.1@35997.57,5636.76 U1.19 | length 9783.2
  Top Layer w5: 1211.31,3711.29 1224.41,3698.19 1224.41,3208.66 ; v2(1224.41,2594.49) 1224.41,3208.66 ; v2(1389.76,2429.13) 1607.64,2211.26 ; 1586.31,2961.29 1471.79,2961.29 1224.41,3208.66 ; 1773.79,2211.26 1607.64,2211.26 ; v2(1862.2,1149.61) 1862.2,1098.43 1492.54,728.76 1492.54,711.26 1503.94,699.86 1503.94,275.59 1649.61,129.92 6303.14,129.92 6326.76,153.54 v2(6326.76,200.79) ; 2148.79,1461.26 2148.15,1460.63 v2(1952.76,1460.63) 1607.64,1805.75 1607.64,2211.26
  Bottom Layer w5: v2(1224.41,2594.49) v2(1389.76,2429.13) ; v2(1862.2,1149.61) 1862.2,1370.08 v2(1952.76,1460.63) ; v2(6326.76,200.79) 6326.76,267.7 6330.71,271.65 U1.19@6326.77,275.59
NetD1_SKEY72_1: D1.1@37741.52,5603.74 D1.1@39356.21,5603.74 D1.1@40970.91,5603.74 D1.1@42585.6,5603.74 D1.1@44200.29,5603.74 MX.1@37612.26,5636.76 MX.1@39226.95,5636.76 MX.1@40841.65,5636.76 MX.1@42456.34,5636.76 MX.1@44071.03,5636.76 U1.18 | length 10609
  Top Layer w5: 461.29,3711.31 476.38,3696.22 476.38,3133.66 ; 648.78,2961.26 476.38,3133.66 ; 742.53,2211.25 476.38,2477.41 ; 929.61,1460.84 582.47,1460.84 476.38,1566.93 ; v2@6358.27,165.35 6358.27,141.73 6326.77,110.24 712.6,110.24 570.87,251.97 570.87,695.43 555.03,711.26 476.38,789.92 476.38,1566.93 ; 476.38,1566.93 476.38,2477.41 ; 476.38,2477.41 476.38,3133.66
  Bottom Layer w5: v2(6358.05,172.44) 6358.05,273.4 U1.18@6358.27,273.62 ; U1.18@6358.27,275.59 U1.18@6360.24,273.62
NetR1_2: R1.2 USB1.2 | length 99.6
  Bottom Layer w5: R1.2@6828.15,568.31 USB1.2@6923.82,568.31
  Bottom Layer w10: R1.2@6826.77,566.93 R1.2@6828.15,568.31 ; USB1.2@6923.82,568.31 USB1.2@6925.2,569.68
NetR2_2: R2.2 USB1.1 | length 100.1
  Bottom Layer w5: R2.2@6826.77,523.62 USB1.1@6921.26,523.62
  Bottom Layer w10: USB1.1@6921.26,523.62 USB1.1@6925.2,519.68
NetSKLED_SKEY1_2: SKLED.2@1479.29,4952.74
NetSKLED_SKEY2_2: SKLED.2@16620.14,172.52 SKLED.4@1274.57,5007.86
NetSKLED_SKEY3_2: SKLED.2@18234.84,172.52 SKLED.4@16415.42,227.64
NetSKLED_SKEY4_2: SKLED.2@19849.53,172.52 SKLED.4@18030.11,227.64
NetSKLED_SKEY5_2: SKLED.2@21464.22,172.52 SKLED.4@19644.8,227.64
NetSKLED_SKEY6_2: SKLED.2@23078.92,172.52 SKLED.4@21259.5,227.64
NetSKLED_SKEY7_2: SKLED.2@24693.61,172.52 SKLED.4@22874.19,227.64
NetSKLED_SKEY8_2: SKLED.2@26308.3,172.52 SKLED.4@24488.89,227.64
NetSKLED_SKEY9_2: SKLED.2@27923,172.52 SKLED.4@26103.58,227.64
NetSKLED_SKEY10_2: SKLED.2@29537.69,172.52 SKLED.4@27718.27,227.64
NetSKLED_SKEY11_2: SKLED.2@31152.38,172.52 SKLED.4@29332.97,227.64
NetSKLED_SKEY12_2: SKLED.2@32767.08,172.52 SKLED.4@30947.66,227.64
NetSKLED_SKEY13_2: SKLED.2@34381.77,172.52 SKLED.4@32562.35,227.64
NetSKLED_SKEY14_2: SKLED.2@35996.46,172.52 SKLED.4@34177.05,227.64
NetSKLED_SKEY15_2: SKLED.2@37611.16,172.52 SKLED.4@35791.74,227.64
NetSKLED_SKEY16_2: SKLED.2@39225.85,172.52 SKLED.4@37406.43,227.64
NetSKLED_SKEY17_2: SKLED.2@40840.55,172.52 SKLED.4@39021.13,227.64
NetSKLED_SKEY18_2: SKLED.2@42455.24,172.52 SKLED.4@40635.82,227.64
NetSKLED_SKEY19_2: SKLED.2@44069.93,172.52 SKLED.4@42250.51,227.64
NetSKLED_SKEY20_2: SKLED.2@15005.45,1862.47 SKLED.4@43865.21,227.64
NetSKLED_SKEY21_2: SKLED.2@16620.14,1862.47 SKLED.4@14800.72,1917.59
NetSKLED_SKEY22_2: SKLED.2@18234.84,1862.47 SKLED.4@16415.42,1917.59
NetSKLED_SKEY23_2: SKLED.2@19849.53,1862.47 SKLED.4@18030.11,1917.59
NetSKLED_SKEY24_2: SKLED.2@21464.22,1862.47 SKLED.4@19644.8,1917.59
NetSKLED_SKEY25_2: SKLED.2@23078.92,1862.47 SKLED.4@21259.5,1917.59
NetSKLED_SKEY26_2: SKLED.2@24693.61,1862.47 SKLED.4@22874.19,1917.59
NetSKLED_SKEY27_2: SKLED.2@26308.3,1862.47 SKLED.4@24488.89,1917.59
NetSKLED_SKEY28_2: SKLED.2@27923,1862.47 SKLED.4@26103.58,1917.59
NetSKLED_SKEY29_2: SKLED.2@29537.69,1862.47 SKLED.4@27718.27,1917.59
NetSKLED_SKEY30_2: SKLED.2@31152.38,1862.47 SKLED.4@29332.97,1917.59
NetSKLED_SKEY31_2: SKLED.2@32767.08,1862.47 SKLED.4@30947.66,1917.59
NetSKLED_SKEY32_2: SKLED.2@34381.77,1862.47 SKLED.4@32562.35,1917.59
NetSKLED_SKEY33_2: SKLED.2@35996.46,1862.47 SKLED.4@34177.05,1917.59
NetSKLED_SKEY34_2: SKLED.2@37611.16,1862.47 SKLED.4@35791.74,1917.59
NetSKLED_SKEY35_2: SKLED.2@39225.85,1862.47 SKLED.4@37406.43,1917.59
NetSKLED_SKEY36_2: SKLED.2@40840.55,1862.47 SKLED.4@39021.13,1917.59
NetSKLED_SKEY37_2: SKLED.2@42455.24,1862.47 SKLED.4@40635.82,1917.59
NetSKLED_SKEY38_2: SKLED.2@44069.93,1862.47 SKLED.4@42250.51,1917.59
NetSKLED_SKEY39_2: SKLED.2@15005.45,3552.42 SKLED.4@43865.21,1917.59
NetSKLED_SKEY40_2: SKLED.2@16620.14,3552.42 SKLED.4@14800.72,3607.54
NetSKLED_SKEY41_2: SKLED.2@18234.84,3552.42 SKLED.4@16415.42,3607.54
NetSKLED_SKEY42_2: SKLED.2@19849.53,3552.42 SKLED.4@18030.11,3607.54
NetSKLED_SKEY43_2: SKLED.2@21464.22,3552.42 SKLED.4@19644.8,3607.54
NetSKLED_SKEY44_2: SKLED.2@23078.92,3552.42 SKLED.4@21259.5,3607.54
NetSKLED_SKEY45_2: SKLED.2@24693.61,3552.42 SKLED.4@22874.19,3607.54
NetSKLED_SKEY46_2: SKLED.2@26308.3,3552.42 SKLED.4@24488.89,3607.54
NetSKLED_SKEY47_2: SKLED.2@27923,3552.42 SKLED.4@26103.58,3607.54
NetSKLED_SKEY48_2: SKLED.2@29537.69,3552.42 SKLED.4@27718.27,3607.54
NetSKLED_SKEY49_2: SKLED.2@31152.38,3552.42 SKLED.4@29332.97,3607.54
NetSKLED_SKEY50_2: SKLED.2@32767.08,3552.42 SKLED.4@30947.66,3607.54
NetSKLED_SKEY51_2: SKLED.2@34381.77,3552.42 SKLED.4@32562.35,3607.54